# Altium PCB PIPOCPUD_2006.PCBDOC (part 4 of 10)
Units mm, origin at the board's own origin, x right, y up, seen from the top; angles counter-clockwise.
Board outline 179.96 x 114.94 mm, 2 copper layers (Top Layer, Top, Bottom Layer, Bottom), stack 1.341 mm thick; 247 components, 222 nets, 910 pads, 491 vias.
Unrouted connection lines stored in the file: 2.
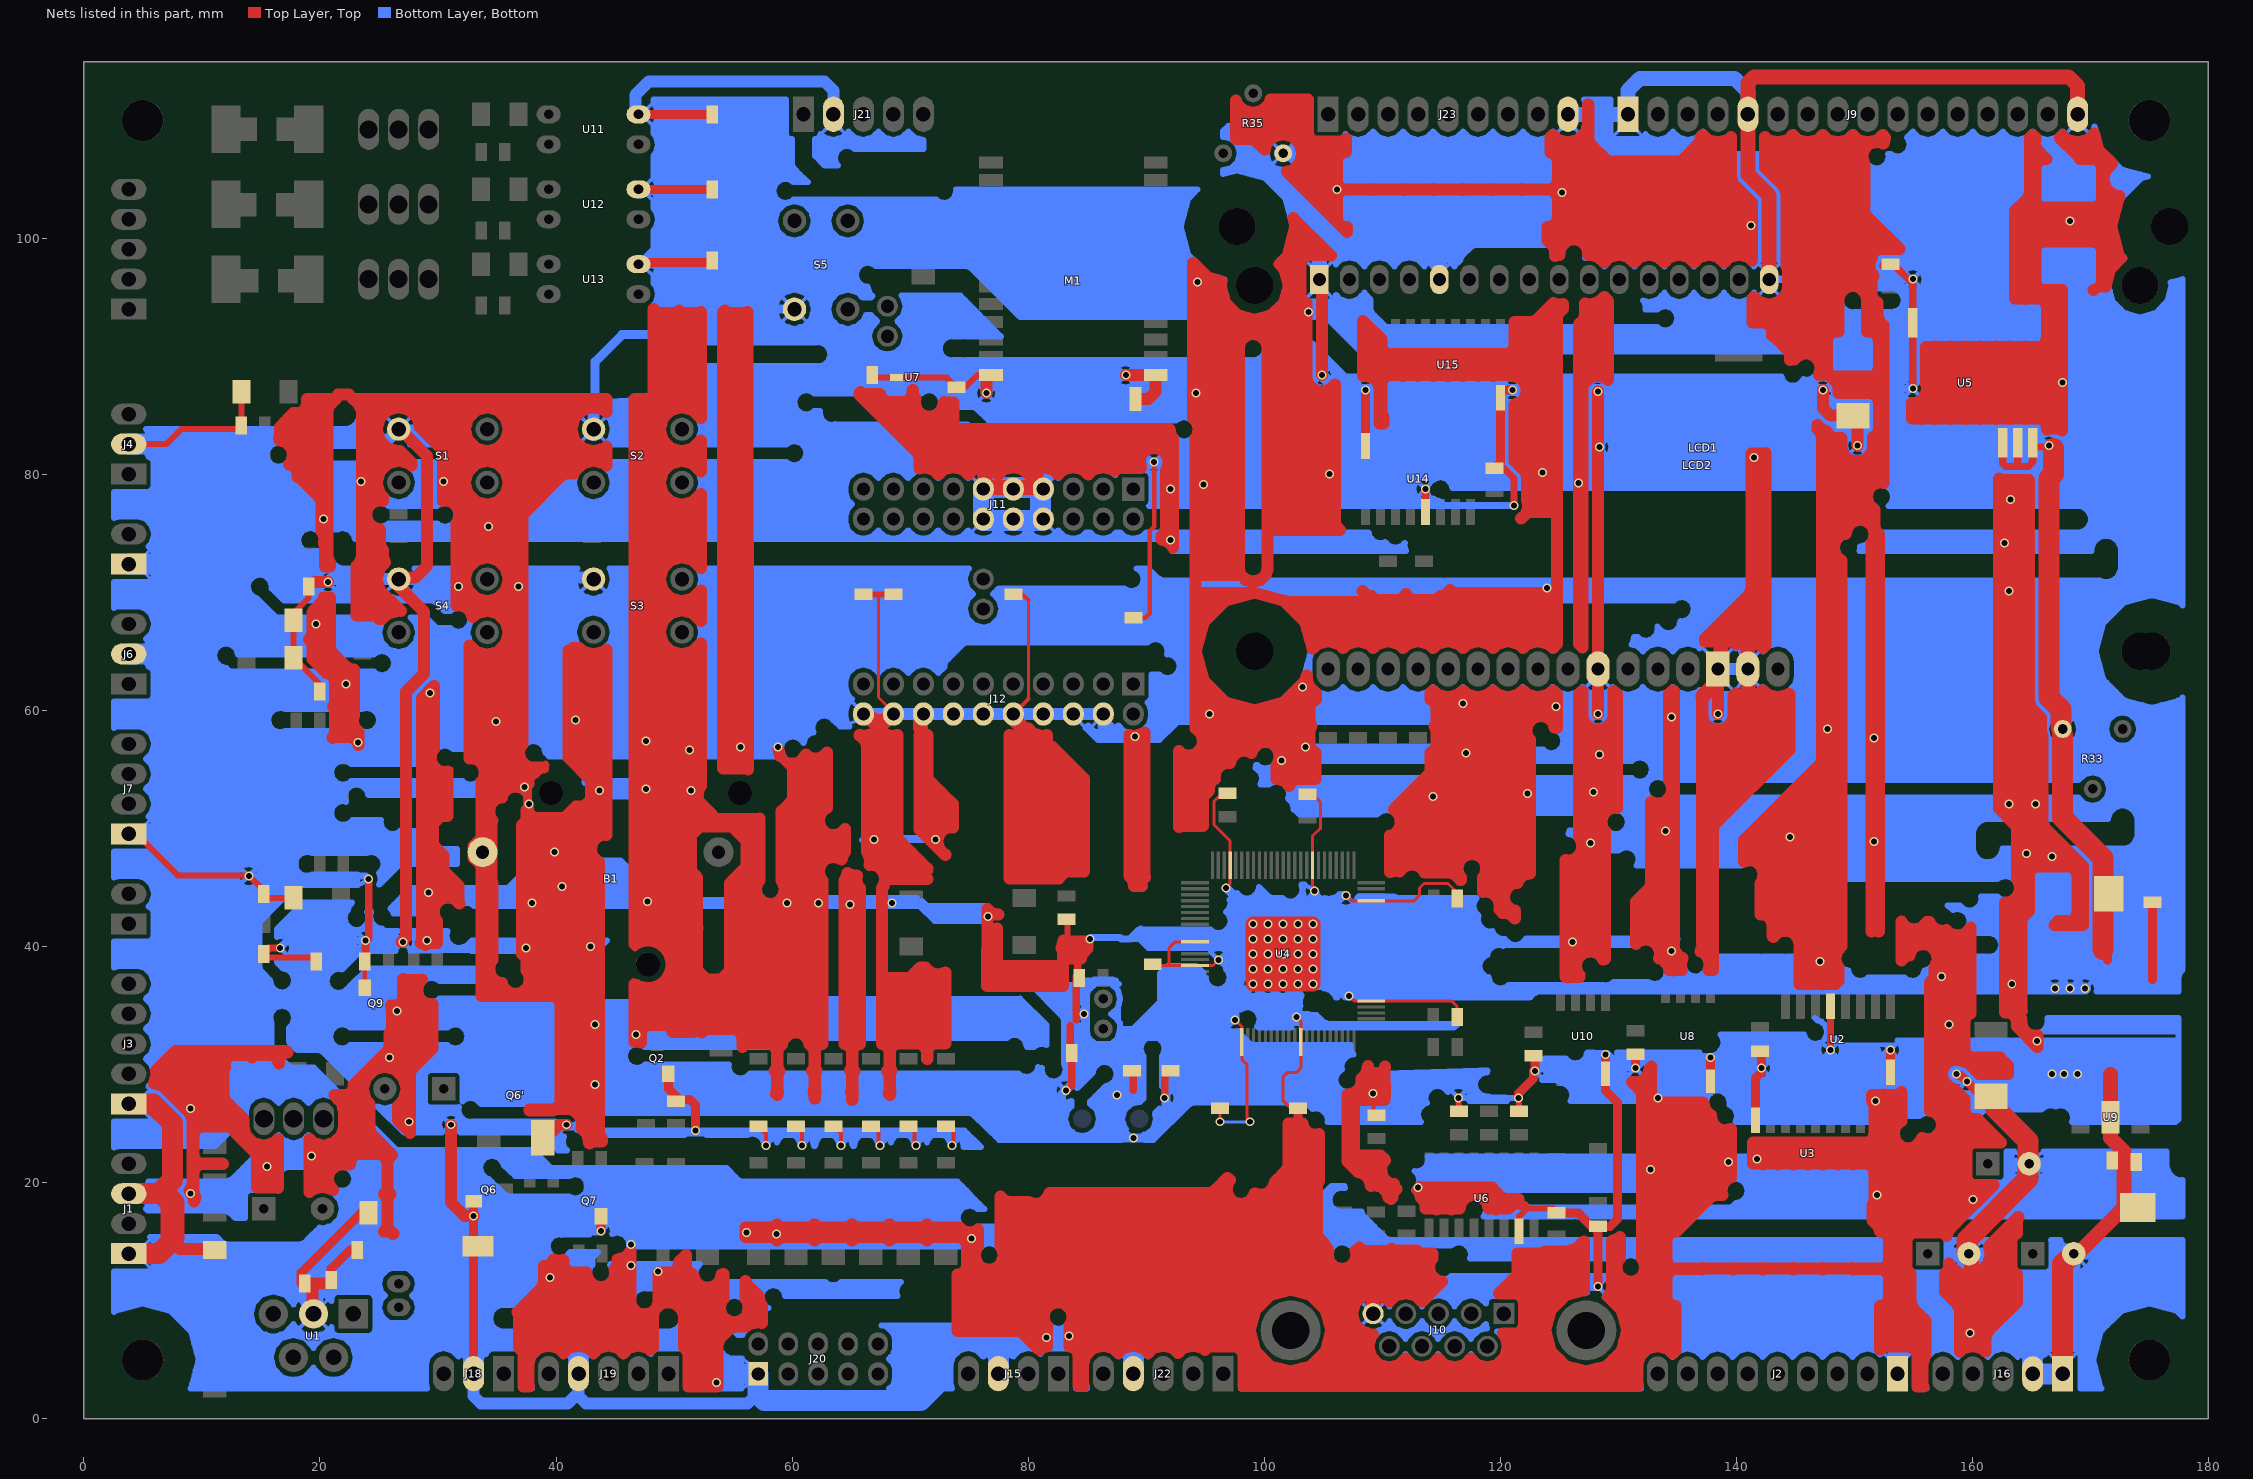
[diagram p4: the nets of this part, all layers, seen from the top]

## Via types
v1: diameter 0.762, hole 0.508, Top Layer, Top to Bottom Layer, Bottom, 489 vias
v2: diameter 0.864, hole 0.813, Top Layer, Top to Bottom Layer, Bottom, 2 vias

## Nets (pads, with @x,y where several pads share a name; then routed paths per layer and width w, separated by ;. In a path a pad name is that pad's centre, name@x,y a point inside that pad or via, vN(x,y) a via of type N, cw(c..) or ccw(c..) an arc to the next point about the centre after c; other vN are vias at no path point) (continued)
GND: (continued)
  Top Layer, Top w1.016: 139.751,60.858 144.475,60.858 ; 140.36,69.088 142.469,69.088 ; 140.64,47.447 148.92,47.447 ; 140.64,48.209 148.92,48.209 ; 140.64,48.971 148.92,48.971 ; 141.072,69.85 142.469,69.85 ; 141.275,70.612 142.469,70.612 ; 141.275,71.374 142.469,71.374 ; 141.275,72.136 142.469,72.136 ; 141.275,72.898 142.469,72.898 ; 141.275,73.66 142.469,73.66 ; 141.275,74.422 142.469,74.422 ; 141.275,75.184 142.469,75.184 ; 141.275,75.946 142.469,75.946 ; 141.275,76.708 142.469,76.708 ; 141.275,77.47 142.469,77.47 ; 141.275,78.232 142.469,78.232 ; 141.275,78.994 142.469,78.994 ; 141.275,79.756 142.469,79.756 ; 141.275,80.518 142.469,80.518 ; v1@141.275,81.28 142.469,81.28 ; 141.351,49.733 148.92,49.733 ; 141.376,93.167 148.666,93.167 ; 141.376,93.929 148.666,93.929 ; 141.376,94.691 141.834,94.691 ; 141.402,21.768 159.487,21.768 ; 141.402,22.53 159.487,22.53 ; 141.402,23.292 153.695,23.292 ; 142.037,42.875 148.92,42.875 ; 142.037,43.637 148.92,43.637 ; 142.037,44.399 148.92,44.399 ; 142.037,45.161 148.92,45.161 ; 142.113,50.495 148.92,50.495 ; 142.138,61.62 142.316,61.62 ; 142.164,46.685 148.92,46.685 ; 142.265,45.923 148.92,45.923 ; 142.418,106.121 150.851,106.121 ; 142.418,106.883 150.647,106.883 ; 142.418,107.645 150.901,107.645 ; 142.418,108.407 142.545,108.407 ; 142.875,51.257 148.92,51.257 ; 142.951,92.405 148.666,92.405 ; 142.977,42.113 148.92,42.113 ; 143.053,41.351 144.12,41.351 ; 143.053,105.359 150.851,105.359 ; 143.231,91.643 147.726,91.643 ; 143.637,52.019 148.92,52.019 ; 143.688,94.691 148.615,94.691 ; 143.815,104.597 150.851,104.597 ; 143.993,90.881 147.65,90.881 ; 144.221,97.739 151.282,97.739 ; 144.221,98.501 151.486,98.501 ; 144.221,99.263 153.619,99.263 ; 144.221,100.025 152.857,100.025 ; 144.221,100.787 152.095,100.787 ; 144.221,101.549 151.333,101.549 ; 144.221,102.311 150.825,102.311 ; 144.221,103.073 150.851,103.073 ; 144.221,103.835 150.851,103.835 ; 144.272,95.453 148.869,95.453 ; 144.374,96.215 151.46,96.215 ; 144.374,96.977 151.486,96.977 ; 144.399,52.781 148.92,52.781 ; 144.45,108.407 145.085,108.407 ; 144.526,90.119 145.415,90.119 ; 145.161,53.543 148.92,53.543 ; 145.237,40.589 148.92,40.589 ; 145.339,37.541 148.666,37.541 ; 145.339,38.303 148.59,38.303 ; 145.339,39.065 148.387,39.065 ; 145.339,39.827 148.742,39.827 ; 145.923,54.305 148.92,54.305 ; 146.406,90.119 147.65,90.119 ; 146.685,55.067 148.92,55.067 ; 146.863,84.023 147.015,84.023 ; 146.99,108.407 147.625,108.407 ; 147.041,88.595 147.777,88.595 ; 147.066,89.357 147.65,89.357 ; 147.218,83.261 147.904,83.261 ; 147.244,55.829 148.92,55.829 ; 147.244,56.591 148.92,56.591 ; 147.244,57.353 148.92,57.353 ; 147.244,58.115 148.92,58.115 ; 147.244,58.877 148.92,58.877 ; 147.244,59.639 148.92,59.639 ; 147.244,60.401 148.92,60.401 ; 147.244,61.163 148.92,61.163 ; 147.244,61.925 148.92,61.925 ; 147.244,62.687 148.92,62.687 ; 147.244,63.449 148.92,63.449 ; 147.244,64.211 148.92,64.211 ; 147.244,64.973 148.92,64.973 ; 147.244,65.735 148.92,65.735 ; 147.244,66.497 148.92,66.497 ; 147.244,67.259 148.92,67.259 ; 147.244,68.021 148.92,68.021 ; 147.244,68.783 148.92,68.783 ; 147.244,69.545 148.92,69.545 ; 147.244,70.307 148.92,70.307 ; 147.244,71.069 148.92,71.069 ; 147.244,71.831 148.92,71.831 ; 147.244,72.593 148.92,72.593 ; 147.244,73.355 148.336,73.355 ; 147.244,74.117 148.311,74.117 ; 147.244,74.879 148.971,74.879 ; 147.244,75.641 149.504,75.641 ; 147.244,76.403 151.714,76.403 ; 147.244,77.165 151.511,77.165 ; 147.244,77.927 151.079,77.927 ; 147.244,78.689 151.181,78.689 ; 147.244,79.451 152.476,79.451 ; 147.244,80.213 152.476,80.213 ; 147.244,80.975 152.476,80.975 ; 147.244,81.737 149.073,81.737 ; 147.244,82.499 148.92,82.499 ; v1(147.32,87.122) 147.32,85.598 147.955,84.963 C24.2@149.86,84.963 150.241,84.963 v1(150.241,82.423) ; 148.438,87.833 152.476,87.833 ; 148.641,87.071 152.476,87.071 ; 148.92,41.351 144.145,41.351 ; 149.53,108.407 150.165,108.407 ; 150.825,95.453 151.46,95.453 ; 151.054,92.405 152.451,92.405 ; 151.054,93.167 152.019,93.167 ; 151.054,93.929 151.968,93.929 ; 151.079,94.691 151.74,94.691 ; 151.384,81.737 152.451,81.737 ; 151.435,41.351 151.74,41.351 ; 151.435,42.113 152.095,42.113 ; 151.435,42.875 152.095,42.875 ; 151.435,43.637 152.095,43.637 ; 151.435,44.399 152.095,44.399 ; 151.435,45.161 152.095,45.161 ; 151.435,45.923 152.095,45.923 ; 151.435,46.685 152.095,46.685 ; 151.435,47.447 152.095,47.447 ; 151.435,48.209 152.095,48.209 ; v1@151.435,48.971 152.095,48.971 ; 151.435,49.733 152.095,49.733 ; 151.435,50.495 152.095,50.495 ; 151.435,51.257 152.095,51.257 ; 151.435,52.019 152.095,52.019 ; 151.435,52.781 152.095,52.781 ; 151.435,53.543 152.095,53.543 ; 151.435,54.305 152.095,54.305 ; 151.435,55.067 152.095,55.067 ; 151.435,55.829 152.095,55.829 ; 151.435,56.591 152.095,56.591 ; v1@151.435,57.353 152.095,57.353 ; 151.435,58.115 152.095,58.115 ; 151.435,58.877 152.095,58.877 ; 151.435,59.639 152.095,59.639 ; 151.435,60.401 152.095,60.401 ; 151.435,61.163 152.095,61.163 ; 151.435,61.925 152.095,61.925 ; 151.435,62.687 152.095,62.687 ; 151.435,63.449 152.095,63.449 ; 151.435,64.211 152.095,64.211 ; 151.435,64.973 152.095,64.973 ; 151.435,65.735 152.095,65.735 ; 151.435,66.497 152.095,66.497 ; 151.435,67.259 152.095,67.259 ; 151.435,68.021 152.095,68.021 ; 151.435,68.783 152.095,68.783 ; 151.435,69.545 152.095,69.545 ; 151.435,70.307 152.095,70.307 ; 151.435,71.069 152.095,71.069 ; 151.435,71.831 152.095,71.831 ; 151.435,72.593 152.095,72.593 ; 151.435,73.355 152.095,73.355 ; 151.435,74.117 152.095,74.117 ; 151.46,75.641 151.714,75.641 ; v1@151.486,27.102 154,27.102 ; 151.536,17.196 159.182,17.196 ; 151.536,17.958 159.944,17.958 ; 151.562,82.499 152.451,82.499 ; 151.638,21.006 159.487,21.006 ; 151.663,24.054 153.34,24.054 ; v1@151.689,18.72 160.706,18.72 ; 151.689,19.482 161.468,19.482 ; 151.689,20.244 159.537,20.244 ; 151.689,24.816 153.543,24.816 ; 151.689,25.578 154,25.578 ; 151.689,26.34 154,26.34 ; 151.714,74.879 152.095,74.879 ; 151.79,83.261 152.451,83.261 ; 151.892,16.434 158.42,16.434 ; 151.917,88.595 152.476,88.595 ; 151.968,91.643 152.451,91.643 ; 152.019,86.309 152.476,86.309 ; 152.07,84.023 152.451,84.023 ; 152.07,84.785 152.476,84.785 ; 152.07,85.547 152.476,85.547 ; 152.07,89.357 152.476,89.357 ; 152.07,90.119 152.476,90.119 ; 152.07,90.881 152.476,90.881 ; 152.07,108.407 152.552,108.407 ; 152.095,41.351 151.765,41.351 ; 152.171,6.528 156.032,6.528 ; 152.171,7.29 156.032,7.29 ; 152.171,8.052 156.032,8.052 ; 152.171,8.814 155.499,8.814 ; 152.4,9.576 154.864,9.576 ; 152.4,12.624 154.457,12.624 ; 152.629,15.672 154.762,15.672 ; 152.908,13.386 154.407,13.386 ; 152.933,10.338 154.762,10.338 ; 152.933,11.1 154.762,11.1 ; 152.933,11.862 154.762,11.862 ; 152.933,14.148 154.407,14.148 ; 152.933,14.91 154.407,14.91 ; 153.975,39.294 154.661,39.294 ; 153.975,40.056 155.194,40.056 ; 153.975,40.818 159.842,40.818 ; 153.975,41.58 154.508,41.58 ; 154.864,85.217 167.589,85.217 ; 154.864,85.979 167.589,85.979 ; 155.194,5.766 156.032,5.766 ; 155.346,3.48 155.778,3.48 ; 155.346,4.242 155.778,4.242 ; 155.346,5.004 155.88,5.004 ; 155.397,23.292 159.842,23.292 ; 155.6,41.58 156.743,41.58 ; 156.032,86.741 167.589,86.741 ; 156.058,88.265 167.589,88.265 ; 156.058,89.027 167.589,89.027 ; 156.058,89.789 167.589,89.789 ; 156.058,90.551 167.589,90.551 ; 156.083,87.503 v1@167.589,87.503 ; 156.388,26.34 159.334,26.34 ; 156.388,27.102 159.283,27.102 ; 156.388,27.864 158.521,27.864 ; 156.388,28.626 157.531,28.626 ; 156.388,29.388 157.429,29.388 ; 156.388,30.15 157.861,30.15 ; 156.388,30.912 159.461,30.912 ; 156.388,31.674 159.334,31.674 ; 156.388,32.436 159.334,32.436 ; 156.388,33.198 159.334,33.198 ; 156.388,33.96 159.385,33.96 ; 156.388,34.722 159.842,34.722 ; 156.388,35.484 159.842,35.484 ; 156.388,36.246 159.842,36.246 ; 156.439,37.008 159.842,37.008 ; 156.769,37.77 159.842,37.77 ; 156.921,38.532 159.842,38.532 ; 156.972,39.294 159.842,39.294 ; 157.048,24.054 161.747,24.054 ; 157.201,25.578 159.614,25.578 ; 157.404,24.816 160.985,24.816 ; 157.632,15.672 157.886,15.672 ; 157.658,11.024 163.779,11.024 ; 157.658,11.786 163.779,11.786 ; 158.115,10.262 163.779,10.262 ; 158.496,12.548 157.912,12.548 ; 158.775,9.5 163.424,9.5 ; 158.928,6.452 161.112,6.452 ; 158.928,7.214 161.239,7.214 ; 158.928,7.976 161.9,7.976 ; 158.928,8.738 162.662,8.738 ; 159.537,30.15 162.738,30.15 ; 159.817,41.58 159.842,41.58 ; 159.842,40.056 156.439,40.056 ; 160.376,29.388 163.017,29.388 ; 160.833,12.548 163.373,12.548 ; 161.366,13.31 163.297,13.31 ; 161.519,14.072 163.297,14.072 ; 161.646,14.834 163.297,14.834 ; 162.23,52.045 165.938,52.045 ; 162.23,52.807 165.938,52.807 ; 162.23,53.569 165.938,53.569 ; 162.23,54.331 165.938,54.331 ; 162.23,55.093 165.938,55.093 ; 162.23,55.855 165.938,55.855 ; 162.23,56.617 165.938,56.617 ; 162.23,57.379 165.938,57.379 ; 162.23,58.141 165.811,58.141 ; 162.23,58.903 165.811,58.903 ; 162.23,59.665 165.481,59.665 ; 162.23,60.427 164.897,60.427 ; 162.23,61.189 164.795,61.189 ; 162.23,61.951 164.795,61.951 ; 162.23,62.713 164.795,62.713 ; 162.23,63.475 164.795,63.475 ; 162.23,64.237 164.795,64.237 ; 162.23,64.999 164.795,64.999 ; 162.23,65.761 164.795,65.761 ; 162.23,66.523 164.795,66.523 ; 162.23,67.285 164.795,67.285 ; 162.23,68.047 164.795,68.047 ; 162.23,68.809 164.795,68.809 ; 162.23,69.571 164.795,69.571 ; 162.23,70.333 164.795,70.333 ; 162.23,71.095 164.795,71.095 ; 162.23,71.857 164.795,71.857 ; 162.23,72.619 164.795,72.619 ; 162.23,73.381 164.795,73.381 ; 162.23,74.143 164.795,74.143 ; 162.23,74.905 164.795,74.905 ; 162.23,75.667 164.795,75.667 ; 162.23,76.429 164.795,76.429 ; 162.23,77.191 164.795,77.191 ; 162.23,77.953 164.795,77.953 ; 162.23,78.715 164.795,78.715 ; 162.23,79.477 164.795,79.477 ; 162.408,15.596 163.601,15.596 ; 162.611,51.283 165.938,51.283 ; 162.738,34.519 164.211,34.519 ; 162.738,35.281 164.16,35.281 ; 162.738,36.043 164.16,36.043 ; 162.738,36.805 164.16,36.805 ; 162.738,37.567 164.16,37.567 ; 162.738,38.329 164.16,38.329 ; 162.738,39.091 164.16,39.091 ; 162.738,39.853 164.16,39.853 ; 162.738,40.615 164.16,40.615 ; 162.738,41.377 164.16,41.377 ; 162.738,42.139 164.16,42.139 ; 162.738,42.901 164.668,42.901 ; 162.738,43.663 164.77,43.663 ; 163.17,16.358 163.779,16.358 ; 163.373,50.521 165.938,50.521 ; 163.601,95.123 167.589,95.123 ; 163.601,95.885 165.506,95.885 ; 163.601,96.647 165.329,96.647 ; 163.601,97.409 165.329,97.409 ; 163.601,98.171 165.329,98.171 ; 163.601,98.933 165.329,98.933 ; 163.601,99.695 165.964,99.695 ; 163.601,100.457 171.856,100.457 ; 163.601,101.219 171.78,101.219 ; 163.601,101.981 171.983,101.981 ; 163.728,33.757 164.135,33.757 ; 163.754,45.949 164.77,45.949 ; 163.754,46.711 165.329,46.711 ; 163.754,47.473 168.656,47.473 ; 163.754,48.235 167.894,48.235 ; 163.754,48.997 167.132,48.997 ; 163.754,49.759 166.37,49.759 ; 163.906,44.425 164.77,44.425 ; 163.982,32.995 164.287,32.995 ; 163.982,45.187 164.77,45.187 ; 164.033,102.743 165.633,102.743 ; 164.109,33.655 164.262,33.02 164.719,32.563 165.354,32.41 165.506,32.436 165.506,31.471 163.754,33.223 163.754,33.68 163.652,33.985 163.347,34.29 163.043,34.392 162.738,34.392 162.738,40.411 162.738,43.739 162.814,43.713 163.424,43.866 163.881,44.323 164.033,44.958 163.881,45.568 163.754,45.695 163.754,49.962 163.678,50.14 163.601,50.292 162.23,51.689 162.23,79.654 162.458,79.553 162.585,79.527 164.795,79.527 164.795,79.273 164.795,61.417 164.795,60.731 165.049,60.122 165.532,59.639 165.811,59.36 165.811,58.191 165.938,57.887 165.938,51.257 165.938,50.571 166.192,49.962 166.675,49.479 169.367,46.787 169.367,41.834 166.954,41.834 167.259,42.139 168.173,42.139 168.478,42.215 168.783,42.52 168.885,42.824 168.885,46.05 168.783,46.355 168.478,46.66 168.173,46.761 165.456,46.761 165.151,46.66 164.846,46.355 164.77,46.05 164.77,43.002 164.668,42.901 ; 164.16,34.671 164.16,34.874 164.109,35.052 164.16,35.204 164.16,42.139 ; 164.744,32.233 v1@165.506,32.233 ; 164.744,103.505 165.329,103.505 ; 164.871,104.267 165.329,104.267 ; 164.871,105.029 165.329,105.029 ; 164.871,105.791 165.329,105.791 ; 164.871,106.553 165.659,106.553 ; 164.871,107.315 165.633,107.315 ; 164.871,108.077 165.303,108.077 ; 166.091,84.455 167.589,84.455 ; 166.243,91.313 167.589,91.313 ; 166.243,94.361 167.589,94.361 ; 166.294,92.075 167.589,92.075 ; 166.294,92.837 167.589,92.837 ; 166.294,93.599 167.589,93.599 ; 167.818,108.077 170.51,108.077 ; 168.224,42.139 169.367,42.139 ; 168.3,46.711 169.367,46.711 ; 168.58,107.315 170.84,107.315 ; 168.885,42.901 169.367,42.901 ; 168.885,43.663 169.367,43.663 ; 168.885,44.425 169.367,44.425 ; 168.885,45.187 169.367,45.187 ; 168.885,45.949 169.367,45.949 ; 170.231,95.606 170.256,95.606 ; 170.282,108.839 170.307,108.839 ; 170.307,99.695 172.06,99.695 ; 170.612,106.553 171.602,106.553 ; 170.637,102.743 172.187,102.743 ; 170.764,95.885 171.323,95.885 ; 170.866,95.987 170.967,96.291 170.967,99.009 170.866,99.314 170.561,99.619 170.256,99.72 166.014,99.72 165.71,99.619 165.405,99.314 165.329,99.009 165.329,96.291 165.405,95.987 165.71,95.682 166.014,95.606 167.589,95.606 167.589,83.693 167.208,83.871 166.522,83.871 166.294,83.769 166.294,84.023 166.218,84.328 165.913,84.633 165.583,84.734 164.592,84.734 164.465,84.684 164.313,84.734 163.322,84.734 163.195,84.684 163.043,84.734 162.052,84.734 161.925,84.684 161.773,84.734 160.782,84.734 160.655,84.684 160.503,84.734 159.512,84.734 159.385,84.684 159.233,84.734 158.242,84.734 158.115,84.684 157.963,84.734 156.972,84.734 156.845,84.684 156.693,84.734 155.702,84.734 155.575,84.684 155.423,84.734 154.864,84.734 154.864,86.03 154.94,86.004 155.55,86.157 156.007,86.614 156.159,87.249 156.058,87.681 156.058,90.78 156.693,90.78 156.845,90.805 156.972,90.78 157.963,90.78 158.115,90.805 158.242,90.78 159.233,90.78 159.385,90.805 159.512,90.78 160.503,90.78 160.655,90.805 160.782,90.78 161.773,90.78 161.925,90.805 162.052,90.78 163.043,90.78 163.195,90.805 163.322,90.78 164.313,90.78 164.465,90.805 164.592,90.78 165.583,90.78 165.913,90.856 166.218,91.161 166.294,91.465 166.294,94.183 166.218,94.488 165.913,94.793 165.583,94.894 164.592,94.894 164.465,94.844 164.313,94.894 163.601,94.894 163.601,102.311 164.414,103.124 164.694,103.403 164.744,103.53 164.871,103.784 164.871,104.216 164.871,108.509 165.1,108.737 165.329,108.509 165.329,108.28 165.303,108.28 165.303,107.848 165.43,107.594 165.481,107.467 165.76,107.188 166.268,106.705 166.014,106.705 165.71,106.604 165.405,106.299 165.329,105.994 165.329,103.276 165.405,102.972 165.71,102.667 166.014,102.591 170.256,102.591 170.561,102.667 170.866,102.972 170.967,103.276 170.967,105.994 170.866,106.299 170.561,106.604 170.256,106.705 169.088,106.705 169.062,106.756 169.012,106.883 168.732,107.163 167.411,108.483 167.411,108.509 167.64,108.737 168.021,108.331 168.91,108.102 169.774,108.331 170.307,108.864 170.663,107.493 171.831,106.324 171.272,105.766 171.069,105.029 171.272,104.267 171.831,103.708 172.466,103.556 172.39,103.454 171.729,100.99 172.39,98.501 172.568,98.323 171.679,97.409 ; 170.967,96.647 171.475,96.647 ; 170.967,97.409 171.679,97.409 ; 170.967,98.171 172.415,98.171 ; 170.967,98.933 172.263,98.933 ; 170.967,103.505 172.441,103.505 ; 170.967,104.267 171.298,104.267 ; 170.967,105.029 171.094,105.029 ; 170.967,105.791 171.298,105.791 ; 171.298,95.987 171.679,97.409 ; 19.253,66.192 19.355,66.497 19.355,68.301 19.939,68.91 19.99,69.037 20.244,69.291 20.32,69.545 20.853,69.545 20.853,65.735 20.853,65.303 20.879,65.176 21.006,64.897 21.336,64.567 21.895,64.008 22.225,63.678 22.352,63.627 22.428,63.551 22.733,63.475 22.885,63.475 22.885,59.614 22.758,59.182 22.911,58.547 23.266,58.217 23.266,57.048 23.165,57.353 22.86,57.658 22.555,57.76 21.361,57.76 21.057,57.658 21.057,57.709 21.184,57.861 21.285,58.166 21.285,59.919 21.184,60.223 21.107,60.325 21.184,60.401 21.285,60.706 21.285,62.459 21.184,62.763 20.879,63.068 20.574,63.17 20.549,63.17 19.355,64.364 19.355,65.532 19.253,65.837 19.075,66.015 19.253,66.192 ; 20.422,72.187 20.422,73.889 20.345,74.168 20.396,74.422 20.244,75.032 20.117,75.159 20.117,77.673 19.939,78.054 19.634,78.359 18.364,79.629 18.085,79.756 18.085,80.137 17.983,80.442 17.678,80.747 17.374,80.823 17.577,81.026 17.729,81.661 17.577,82.271 17.12,82.728 16.586,82.855 16.535,83.007 16.612,83.236 16.612,83.998 17.78,85.192 18.186,85.192 18.491,85.268 18.796,85.573 18.898,85.877 18.898,86.36 21.361,86.36 21.26,86.309 20.853,85.903 ; 20.422,72.187 20.853,72.187 ; 20.422,72.187 20.853,72.187 ; 20.853,72.187 20.853,72.492 20.65,72.974 20.65,73.99 20.65,74.574 20.65,85.369 20.853,85.903 ; 21.844,24.003 22.022,24.663 22.022,26.111 21.844,26.772 21.336,27.28 21.311,27.305 21.234,27.407 22.149,27.407 22.454,27.483 22.758,27.788 22.86,28.092 22.86,28.245 23.165,28.575 ; 21.844,24.003 21.184,23.343 20.32,23.114 19.431,23.343 19.101,23.698 19.101,19.202 19.279,19.38 20.218,19.634 21.107,19.38 20.879,19.634 20.803,19.685 20.752,19.914 20.701,20.066 20.701,20.142 20.65,20.32 20.701,20.472 20.701,20.549 20.752,20.701 20.803,20.93 20.879,20.98 21.209,21.311 21.26,21.387 21.488,21.438 21.641,21.514 21.717,21.514 21.895,21.539 22.047,21.514 22.555,21.514 22.555,21.717 ; 23.165,28.575 25.375,30.785 25.705,31.115 25.832,31.394 25.883,31.521 25.883,31.953 25.883,32.639 26.01,32.766 26.086,33.096 26.086,34.696 26.01,34.976 26.34,34.976 26.67,35.052 26.975,35.357 27.051,35.687 27.051,37.236 27.33,37.16 28.524,37.16 28.626,37.186 28.372,36.932 28.219,36.322 28.372,35.687 28.829,35.23 29.464,35.077 29.54,35.103 29.54,31.369 27.762,29.591 27.686,29.439 27.635,29.261 27.635,24.206 26.594,25.248 26.594,26.467 27.102,27 27.356,27.94 27.102,28.854 26.416,29.54 25.502,29.794 24.562,29.54 23.876,28.854 23.622,27.94 23.876,27 24.206,26.67 24.206,24.511 24.384,24.079 24.714,23.749 26.111,22.327 25.806,22.022 25.73,21.717 ; 37.262,2.718 37.262,5.41 37.16,5.715 36.855,6.02 36.881,8.763 36.754,9.042 38.76,11.049 38.964,11.481 38.964,12.929 39.116,12.929 39.421,13.005 39.726,13.31 39.776,13.487 40.31,13.36 40.615,13.437 40.615,13.081 40.691,12.776 40.996,12.471 41.3,12.395 42.494,12.395 42.57,12.395 42.57,12.37 42.723,11.735 43.18,11.278 43.815,11.125 44.425,11.278 44.882,11.735 45.034,12.37 44.958,12.649 45.085,12.776 45.187,13.081 45.187,13.487 45.212,13.487 45.822,13.64 46.279,14.097 46.304,14.173 46.304,10.185 46.253,10.033 46.304,9.855 46.304,9.779 46.355,9.627 46.406,9.398 46.482,9.347 46.812,9.017 46.863,8.941 47.092,8.89 47.244,8.839 47.32,8.839 47.498,8.788 47.65,8.839 47.727,8.839 47.879,8.89 48.108,8.941 48.387,9.246 48.209,8.763 48.209,6.02 47.981,5.817 47.854,5.944 46.99,6.172 46.101,5.944 45.72,5.537 45.314,5.944 44.45,6.172 43.561,5.944 43.18,5.537 42.774,5.944 41.91,6.172 41.021,5.944 40.64,5.537 40.234,5.944 39.37,6.172 38.481,5.944 37.821,5.283 37.668,4.623 37.668,2.972 37.719,2.718 ; 37.262,2.718 37.719,2.718 ; 37.262,2.718 37.719,2.718 ; 51.232,2.718 51.232,5.41 51.13,5.715 50.851,6.02 50.851,8.763 50.648,9.246 50.267,9.627 49.784,9.83 49.251,9.83 48.768,9.627 48.565,9.398 48.616,9.627 48.692,9.779 48.692,9.855 48.717,10.033 48.692,10.185 48.692,12.395 49.708,12.395 50.038,12.471 50.343,12.776 50.419,13.106 50.419,13.284 51.029,13.868 51.029,12.878 51.105,12.573 51.41,12.268 51.613,12.217 51.74,11.684 52.197,11.227 52.832,11.074 53.442,11.227 53.899,11.684 54.026,12.217 54.178,12.243 54.178,10.135 54.026,10.008 53.873,9.398 54.026,8.763 54.483,8.306 55.118,8.153 55.728,8.306 56.185,8.763 56.337,9.398 56.185,10.008 56.058,10.135 56.058,11.659 56.159,11.354 57.201,10.338 57.175,10.287 57.328,9.652 57.429,9.576 ; 51.232,2.718 v1@53.67,2.718 ; 51.232,2.718 v1@53.67,2.718 ; v1@53.67,2.718 53.67,5.664 53.67,6.248 53.873,6.782 54.254,7.163 54.28,7.188 54.661,7.569 55.194,7.798 56.109,7.798 56.261,7.95 57.125,8.179 57.429,8.103 57.429,9.576 ; 58.75,27.864 58.75,29.058 58.826,29.362 58.928,29.464 58.826,29.566 58.75,29.87 58.75,31.064 58.826,31.369 59.131,31.674 59.233,32.106 59.69,32.563 60.325,32.715 60.935,32.563 61.392,32.106 61.493,31.674 61.798,31.369 61.9,31.064 61.9,29.87 61.798,29.566 61.697,29.464 61.798,29.362 61.9,29.058 61.9,27.864 61.824,27.584 61.9,27.33 61.9,27.127 61.925,27.102 61.925,27.356 61.976,27.635 61.925,27.889 61.925,29.083 62.001,29.388 ; 65.507,46.025 65.43,45.72 65.583,45.085 65.735,44.958 65.735,31.75 65.481,31.674 65.176,31.369 65.1,31.064 65.1,29.87 65.176,29.566 65.278,29.464 65.176,29.362 65.1,29.058 65.1,27.864 65.151,27.584 65.1,27.33 65.1,26.975 65.075,27 65.075,27.356 64.999,27.635 65.075,27.889 65.075,29.083 64.973,29.388 64.897,29.489 64.973,29.566 65.075,29.87 65.075,31.064 64.973,31.369 64.668,31.674 64.44,31.75 64.44,45.593 64.567,45.72 64.694,46.228 64.77,46.152 65.405,45.999 65.507,46.025 ; 66.345,47.981 66.472,47.854 66.624,47.244 66.548,46.914 66.675,46.939 67.285,46.787 67.742,46.33 67.894,45.72 67.742,45.085 67.615,44.958 67.615,31.75 67.843,31.674 68.148,31.369 68.25,31.064 68.25,29.87 68.148,29.566 68.047,29.464 68.148,29.362 68.25,29.058 68.25,27.864 68.174,27.584 68.199,27.483 68.275,27.407 68.351,27.61 68.275,27.889 68.275,29.083 68.351,29.388 68.428,29.489 68.351,29.566 68.275,29.87 68.275,31.064 68.351,31.369 68.656,31.674 68.961,31.775 70.714,31.775 71.018,31.674 71.323,31.369 71.425,31.064 71.425,30.48 71.45,30.455 ; 76.505,36.627 82.956,36.627 ; 76.505,36.627 82.956,36.627 ; 88.976,45.136 89.637,45.136 88.976,45.136 ; 100.254,90.5 100.279,90.678 100.254,90.83 100.254,90.907 100.178,91.059 100.127,91.288 99.67,91.745 99.441,91.796 99.289,91.872 99.212,91.872 99.06,91.897 98.882,91.872 98.806,91.872 98.654,91.796 98.425,91.745 98.374,91.669 98.044,91.338 97.968,91.288 97.917,91.059 97.866,90.907 97.866,90.83 97.815,90.678 97.866,90.5 97.866,72.288 97.815,72.136 97.866,71.958 97.866,71.882 97.917,71.73 97.968,71.501 98.044,71.45 98.374,71.12 98.425,71.044 98.654,70.993 98.806,70.942 98.882,70.942 99.06,70.891 99.212,70.942 99.289,70.942 99.441,70.993 99.67,71.044 100.127,71.501 100.178,71.73 100.254,71.882 100.254,71.958 100.279,72.136 100.254,72.288 100.254,90.5 ; 104.47,15.672 104.521,15.494 104.597,15.342 105.105,14.808 105.181,14.58 105.461,14.3 105.359,13.919 105.512,13.284 105.969,12.827 106.604,12.675 107.213,12.827 107.671,13.284 107.823,13.919 107.747,14.249 107.848,14.275 108.077,14.478 108.28,14.275 108.585,14.199 110.338,14.199 110.642,14.275 110.795,14.402 110.871,14.326 111.176,14.249 112.928,14.249 112.954,14.249 113.157,14.046 113.462,13.97 114.249,13.97 114.249,13.564 114.097,13.437 113.944,12.827 114.097,12.192 114.554,11.735 115.037,11.608 114.148,10.719 113.868,10.439 113.843,10.389 113.36,9.906 112.852,10.414 111.989,10.643 111.1,10.414 110.592,9.906 110.084,10.414 109.22,10.643 108.331,10.414 107.671,9.754 107.442,8.89 107.671,8.001 108.331,7.341 109.195,7.112 109.042,6.985 108.814,6.121 109.042,5.232 109.703,4.572 110.592,4.343 111.455,4.572 111.963,5.08 112.471,4.572 113.36,4.343 114.224,4.572 114.732,5.08 115.24,4.572 116.129,4.343 116.992,4.572 117.5,5.08 118.008,4.572 118.897,4.343 119.761,4.572 120.421,5.232 120.65,6.121 120.421,6.985 120.218,7.188 121.285,7.188 121.59,7.264 121.895,7.569 121.996,7.874 121.996,9.881 121.895,10.185 121.59,10.49 121.285,10.592 119.863,10.592 120.98,11.684 121.26,11.963 121.31,12.09 121.437,12.344 121.437,12.776 121.437,13.97 122.072,13.97 122.225,13.995 122.352,13.97 123.342,13.97 123.647,14.046 123.774,14.173 123.876,14.148 ; 104.47,15.672 104.47,19.736 104.521,19.914 104.597,20.066 104.648,20.117 104.648,24.105 104.394,24.028 103.759,24.181 103.302,24.638 103.226,24.994 102.032,24.994 102.032,21.387 101.956,21.209 101.879,21.057 100.889,20.041 100.762,19.558 100.305,19.101 99.695,18.948 99.187,19.075 99.111,18.796 98.654,18.339 98.044,18.186 97.409,18.339 96.952,18.796 96.799,19.431 96.952,20.041 97.104,20.193 96.876,20.396 96.037,19.533 95.91,19.406 95.783,19.279 95.783,19.253 95.758,19.253 95.606,19.177 95.453,19.126 95.428,19.126 95.25,19.126 95.072,19.101 95.072,19.126 81.788,19.126 81.712,18.796 81.255,18.339 80.645,18.186 80.01,18.339 80.01,18.364 78.283,18.364 78.105,18.415 77.953,18.491 77.648,18.796 77.648,14.58 77.775,14.453 77.927,13.843 77.775,13.208 77.318,12.751 76.708,12.598 76.073,12.751 75.616,13.208 75.463,13.843 75.616,14.453 75.768,14.58 75.768,16.027 75.667,15.926 75.057,15.773 74.422,15.926 74.168,16.205 74.117,16.205 71.907,16.205 71.603,16.281 71.425,16.459 71.247,16.281 70.942,16.205 68.732,16.205 68.428,16.281 68.25,16.459 68.072,16.281 67.767,16.205 65.557,16.205 65.253,16.281 65.075,16.459 64.897,16.281 64.592,16.205 62.382,16.205 62.078,16.281 61.9,16.459 61.722,16.281 61.417,16.205 59.207,16.205 58.903,16.281 58.725,16.459 58.547,16.281 58.242,16.205 56.058,16.205 56.058,15.367 58.242,15.367 58.547,15.265 58.725,15.088 58.903,15.265 59.207,15.367 61.417,15.367 61.722,15.265 61.9,15.088 62.078,15.265 62.382,15.367 64.592,15.367 64.897,15.265 65.075,15.088 65.253,15.265 65.557,15.367 67.767,15.367 68.072,15.265 68.25,15.088 68.428,15.265 68.732,15.367 70.942,15.367 71.247,15.265 71.425,15.088 71.603,15.265 71.907,15.367 74.117,15.367 74.422,15.265 74.727,14.961 74.828,14.656 74.828,12.903 74.727,12.598 74.422,12.294 74.117,12.217 74.016,12.217 74.016,7.417 79.172,7.417 79.35,7.341 79.502,7.264 80.797,5.969 80.797,5.944 80.874,5.944 81.001,5.817 81.229,6.02 81.534,6.121 81.61,6.121 81.61,7.874 81.458,8.001 81.305,8.636 81.458,9.246 81.915,9.703 82.55,9.855 83.16,9.703 83.617,9.246 83.769,8.636 83.617,8.001 83.49,7.874 83.49,6.121 83.541,6.121 83.845,6.02 84.15,5.715 84.252,5.41 84.252,2.743 84.709,2.743 84.658,2.972 84.658,4.623 84.811,5.283 85.471,5.944 86.36,6.172 87.224,5.944 87.63,5.537 88.011,5.944 88.9,6.172 89.764,5.944 90.17,5.537 90.551,5.944 91.44,6.172 92.304,5.944 92.71,5.537 93.091,5.944 93.98,6.172 94.844,5.944 94.971,5.817 95.199,6.02 95.504,6.121 97.511,6.121 97.815,6.02 98.12,5.715 98.222,5.41 98.222,2.743 131.674,2.743 131.623,2.946 131.623,4.597 131.775,5.258 132.436,5.918 133.325,6.147 134.188,5.918 134.595,5.512 134.823,5.74 134.823,9.525 134.772,9.525 134.468,9.601 134.163,9.906 134.087,10.211 134.087,11.963 134.163,12.268 134.468,12.573 134.772,12.675 136.982,12.675 137.109,12.624 137.312,12.7 139.522,12.7 139.7,12.649 139.852,12.7 142.062,12.7 142.24,12.649 142.392,12.7 144.602,12.7 144.78,12.649 144.932,12.7 147.142,12.7 147.32,12.649 147.472,12.7 149.682,12.7 149.885,12.624 150.012,12.675 152.222,12.675 152.527,12.573 152.832,12.268 152.933,11.963 152.933,10.211 152.832,9.906 152.527,9.601 152.222,9.525 152.171,9.525 152.171,5.842 152.324,5.994 152.629,6.096 154.635,6.096 154.94,5.994 155.245,5.69 155.346,5.385 155.346,2.718 ; 112.522,46.939 111.887,46.787 111.455,46.355 111.125,46.431 110.668,46.304 110.668,49.378 110.973,49.454 111.43,49.911 111.582,50.546 111.43,51.156 110.973,51.613 113.944,54.585 114.021,54.737 114.097,54.915 114.097,56.439 114.198,56.464 114.503,56.769 114.605,57.074 114.605,58.268 114.503,58.572 114.402,58.674 114.503,58.776 114.605,59.08 114.605,60.274 114.503,60.579 114.198,60.884 114.071,60.935 114.071,61.468 114.3,61.697 114.63,61.366 115.57,61.112 116.484,61.366 116.84,61.697 117.17,61.366 118.11,61.112 119.024,61.366 119.38,61.697 119.71,61.366 120.65,61.112 121.564,61.366 121.92,61.697 122.25,61.366 123.19,61.112 124.104,61.366 124.46,61.697 124.79,61.366 124.79,58.496 124.587,58.547 124.511,58.903 124.054,59.36 123.444,59.512 122.809,59.36 122.352,58.903 122.199,58.293 122.352,57.658 122.504,57.531 122.504,46.177 ; 112.522,46.939 113.132,46.787 113.589,46.33 113.589,46.279 115.748,46.279 115.926,46.203 116.078,46.126 116.586,45.644 116.662,45.644 116.662,45.847 116.51,45.974 116.357,46.609 116.51,47.219 116.967,47.676 117.602,47.828 118.212,47.676 118.669,47.219 118.821,46.609 118.669,45.974 118.542,45.847 118.542,44.602 118.745,44.653 ; 118.745,44.653 119.355,44.501 119.812,44.044 119.964,43.434 119.913,43.18 120.193,42.901 120.193,42.85 120.269,42.875 120.879,42.723 121.234,42.367 121.234,43.028 120.904,43.104 120.447,43.561 120.294,44.196 120.447,44.806 120.904,45.263 121.437,45.39 121.463,45.568 121.92,46.025 122.504,46.177 ; 123.876,14.148 125.628,14.148 ; 125.628,14.148 125.933,14.224 126.009,14.3 126.086,14.3 126.517,14.478 126.848,14.808 127.076,15.011 127.076,11.328 127.025,11.176 127.076,10.998 127.076,10.922 127.076,10.871 125.527,10.465 124.257,9.195 123.8,7.468 124.257,5.715 125.527,4.445 127.279,3.988 129.007,4.445 130.277,5.715 130.734,7.468 130.277,9.195 129.134,10.338 ; 125.73,47.269 126.34,47.422 126.797,47.879 126.949,48.514 126.797,49.124 126.67,49.251 126.67,61.366 126.949,61.646 126.949,59.411 127.127,58.928 127.508,58.547 127.991,58.369 128.524,58.369 129.007,58.547 129.388,58.928 129.591,59.411 129.591,61.646 129.87,61.366 129.87,51.74 129.794,51.765 129.159,51.613 128.702,51.156 128.549,50.546 128.702,49.911 128.854,49.784 128.854,38.938 128.702,38.887 128.702,38.964 128.245,39.421 127.635,39.573 127,39.421 126.543,38.964 126.39,38.354 126.543,37.719 126.695,37.592 126.695,37.414 125.857,37.414 125.73,37.363 125.578,37.414 125.527,37.414 125.527,47.32 125.73,47.269 ; 129.134,10.338 129.261,10.49 129.337,10.541 129.388,10.77 129.464,10.922 129.464,10.998 129.489,11.176 129.464,11.328 129.464,15.062 129.515,15.062 129.946,15.24 130.124,15.392 130.124,13.564 129.972,13.437 129.819,12.827 129.972,12.192 130.429,11.735 131.064,11.582 131.674,11.735 132.131,12.192 132.283,12.827 132.131,13.437 132.004,13.564 132.004,27.483 131.928,27.661 131.851,27.813 131.14,28.524 131.191,28.524 131.267,28.524 131.445,28.473 131.597,28.524 131.674,28.524 131.826,28.575 132.055,28.626 132.512,29.083 132.563,29.312 132.639,29.464 132.639,29.54 132.664,29.693 132.817,29.845 132.766,29.667 132.766,27.457 132.842,27.153 133.147,26.848 133.477,26.772 134.468,26.772 134.62,26.797 134.747,26.772 135.738,26.772 135.89,26.797 136.017,26.772 137.008,26.772 137.16,26.797 137.185,26.797 137.338,26.162 137.795,25.705 137.846,25.705 137.82,25.654 137.973,25.019 138.43,24.562 139.065,24.409 139.522,24.536 139.522,20.422 139.319,20.371 138.862,19.914 138.709,19.304 138.811,18.948 138.633,18.948 138.201,18.948 137.947,18.821 137.82,18.771 137.541,18.491 135.153,16.104 134.899,15.85 134.772,15.85 134.468,15.748 134.163,15.443 134.087,15.138 134.087,13.386 ; 134.087,13.386 134.163,13.081 134.468,12.776 134.772,12.7 136.982,12.7 137.185,12.751 137.312,12.725 139.522,12.725 139.7,12.751 139.852,12.725 142.062,12.725 142.24,12.751 142.392,12.725 144.602,12.725 144.78,12.751 144.932,12.725 147.142,12.725 147.32,12.751 147.472,12.725 149.682,12.725 149.809,12.751 150.012,12.7 152.222,12.7 152.527,12.776 152.832,13.081 152.933,13.386 152.933,15.138 152.832,15.443 152.527,15.748 152.222,15.85 152.171,15.85 152.171,15.951 152.044,16.205 151.994,16.332 151.714,16.612 151.536,16.789 151.536,18.085 151.587,18.161 151.689,18.466 151.689,20.879 151.587,21.184 151.282,21.488 150.978,21.59 149.987,21.59 149.86,21.539 149.708,21.59 148.717,21.59 148.59,21.539 148.438,21.59 147.447,21.59 147.32,21.539 147.168,21.59 146.177,21.59 146.05,21.539 145.898,21.59 144.907,21.59 144.78,21.539 144.628,21.59 143.637,21.59 143.51,21.539 143.358,21.59 142.367,21.59 142.24,21.539 142.088,21.59 141.402,21.59 141.402,23.368 142.088,23.368 142.24,23.393 142.367,23.368 143.358,23.368 143.51,23.393 143.637,23.368 144.628,23.368 144.78,23.393 144.907,23.368 145.898,23.368 146.05,23.393 146.177,23.368 147.168,23.368 147.32,23.393 147.447,23.368 148.438,23.368 148.59,23.393 148.717,23.368 149.708,23.368 149.86,23.393 149.987,23.368 150.978,23.368 151.282,23.444 151.587,23.749 151.689,24.054 151.689,26.467 151.587,26.772 151.486,26.899 151.486,27.432 152.248,27.432 152.4,27.457 152.527,27.432 153.518,27.432 153.822,27.508 154,27.661 154,25.197 153.924,25.197 153.467,24.74 153.314,24.13 153.467,23.495 153.924,23.038 154.559,22.885 155.169,23.038 155.626,23.495 155.702,23.774 156.21,23.647 156.82,23.8 157.277,24.257 157.429,24.892 157.277,25.502 156.82,25.959 156.388,26.06 156.388,36.932 156.616,37.186 156.693,37.338 156.769,37.516 156.769,38.227 156.896,38.354 157.048,38.989 156.896,39.599 156.439,40.056 ; 137.084,40.284 137.109,40.132 137.084,39.954 137.084,39.878 137.008,39.726 136.957,39.573 137.135,39.548 137.592,39.091 137.744,38.481 137.617,37.998 ; 137.084,40.284 137.084,61.239 137.109,61.239 137.109,59.411 137.287,58.928 137.668,58.547 138.151,58.369 138.684,58.369 139.167,58.547 139.548,58.928 139.751,59.411 139.751,61.239 139.827,61.265 139.979,61.417 140.03,61.366 140.97,61.112 141.884,61.366 142.24,61.697 142.57,61.366 143.51,61.112 144.424,61.366 144.475,61.392 144.475,56.642 138.125,50.292 138.049,50.14 137.998,49.962 137.998,37.998 ; 137.617,37.998 137.998,37.998 ; 137.617,37.998 137.998,37.998 ; 144.145,41.351 143.967,41.326 143.891,41.326 143.739,41.25 143.51,41.199 143.459,41.123 143.129,40.792 143.053,40.869 143.053,41.961 142.9,42.291 142.621,42.57 142.291,42.723 142.037,42.723 142.037,45.339 142.164,45.466 142.316,46.101 142.164,46.711 141.707,47.168 141.097,47.32 140.64,47.193 140.64,47.93 140.64,48.997 147.091,55.474 147.168,55.626 147.244,55.804 147.244,83.236 147.168,83.414 147.091,83.566 146.863,83.82 146.863,84.176 147.193,83.82 147.676,83.642 147.726,83.439 148.031,83.134 148.336,83.058 148.92,83.058 148.92,82.144 149.098,81.661 149.479,81.28 149.962,81.102 150.495,81.102 150.978,81.28 151.359,81.661 151.562,82.144 151.562,83.109 151.663,83.134 151.968,83.439 152.07,83.744 152.07,86.157 151.968,86.462 151.663,86.766 151.359,86.868 148.641,86.868 148.641,87.376 148.438,87.859 148.057,88.24 147.574,88.443 147.041,88.443 146.99,88.392 147.142,89.027 146.99,89.637 146.533,90.094 145.923,90.246 145.288,90.094 144.907,89.713 144.78,89.738 144.551,89.687 144.551,90.119 144.424,90.373 144.374,90.5 144.094,90.78 143.485,91.389 143.205,91.669 143.078,91.719 143.027,91.745 143.027,92.151 142.926,92.456 142.621,92.761 142.316,92.862 141.376,92.862 141.376,94.894 141.503,95.021 141.935,94.59 142.773,94.361 143.586,94.59 144.196,95.199 144.374,95.809 144.374,97.155 144.221,97.714 144.221,103.886 143.993,104.419 143.586,104.826 142.418,105.994 142.418,108.56 142.621,108.331 143.51,108.102 144.374,108.331 144.78,108.737 145.161,108.331 146.05,108.102 146.914,108.331 147.32,108.737 147.701,108.331 148.59,108.102 149.454,108.331 149.86,108.737 150.241,108.331 151.13,108.102 151.994,108.331 152.4,108.737 152.578,108.534 152.451,108.001 151.892,108.153 151.257,108.001 150.8,107.544 150.647,106.934 150.8,106.299 150.851,106.274 150.851,102.692 150.825,102.692 150.825,102.26 150.952,102.006 151.003,101.879 151.282,101.6 153.822,99.085 152.146,99.085 151.841,98.984 151.536,98.679 151.46,98.374 151.46,98.298 151.435,98.273 151.308,97.993 151.282,97.866 151.282,97.434 151.308,97.307 151.435,97.028 151.511,96.952 151.536,96.876 151.613,96.799 151.536,96.698 151.46,96.393 151.46,95.199 151.536,94.894 151.841,94.59 151.968,94.564 151.968,94.488 151.968,93.345 152.146,92.913 152.451,92.608 152.451,91.465 152.476,91.415 152.476,84.074 152.451,84.023 ; 144.145,41.351 144.297,41.326 144.374,41.326 144.526,41.25 144.755,41.199 145.212,40.742 145.263,40.513 145.339,40.361 145.339,40.284 145.364,40.132 145.339,39.954 145.339,36.83 145.898,36.83 146.05,36.779 146.177,36.83 147.168,36.83 147.32,36.779 147.447,36.83 148.412,36.83 148.666,37.084 148.666,38.227 148.514,38.354 148.361,38.989 148.514,39.599 148.793,39.853 148.793,39.878 148.92,40.005 148.92,72.695 148.844,72.695 148.387,73.152 148.234,73.787 148.387,74.397 148.844,74.854 149.25,74.955 149.403,75.54 149.86,75.997 150.495,76.149 151.105,75.997 151.562,75.54 151.714,74.93 151.562,74.295 151.435,74.168 151.435,41.275 151.511,41.326 151.587,41.326 151.765,41.351 ; 151.765,41.351 151.917,41.326 151.994,41.326 152.095,41.275 152.095,74.905 151.841,75.159 151.765,75.311 151.714,75.489 151.714,77.013 151.638,77.013 151.181,77.47 151.028,78.105 151.181,78.715 151.638,79.172 152.273,79.324 152.476,79.273 152.476,81.255 152.451,81.305 152.451,84.023 ; 155.194,40.056 154.737,39.599 154.661,39.243 154.305,39.167 153.975,38.811 153.975,42.113 153.975,42.037 154.432,41.58 155.067,41.427 155.677,41.58 156.134,42.037 156.134,42.088 156.21,42.062 156.337,42.088 156.388,41.91 156.845,41.453 157.48,41.3 157.81,41.377 158.115,41.072 158.75,40.919 159.36,41.072 159.817,41.529 159.842,41.605 159.842,40.411 159.842,39.827 159.842,34.315 159.715,34.29 159.41,33.985 159.334,33.68 159.334,31.267 159.41,30.963 159.715,30.658 160.02,30.582 162.306,30.582 163.017,29.87 163.017,29.21 160.553,29.21 160.122,29.642 159.664,30.074 159.233,30.251 159.233,30.277 159.004,30.328 158.852,30.378 158.775,30.378 158.623,30.429 158.445,30.378 158.369,30.378 158.217,30.328 157.988,30.277 157.937,30.201 157.607,29.87 157.531,29.82 157.48,29.591 157.429,29.439 157.429,29.362 157.378,29.21 157.429,29.032 157.429,28.956 157.48,28.804 157.531,28.575 157.607,28.524 157.734,28.397 158.064,28.067 158.496,27.889 158.826,27.559 158.877,27.483 159.334,27.051 159.334,26.086 159.41,25.781 159.715,25.476 160.02,25.4 160.426,25.4 160.477,25.324 160.96,24.841 162.408,23.368 162.382,23.393 160.172,23.393 159.868,23.292 159.563,22.987 159.487,22.682 159.487,20.472 159.563,20.168 159.868,19.863 160.172,19.787 161.773,19.787 158.547,16.535 158.064,16.053 157.81,15.469 157.607,15.672 157.302,15.773 155.092,15.773 154.788,15.672 154.483,15.367 154.407,15.062 154.407,12.852 154.483,12.548 154.762,12.268 154.762,10.439 154.762,9.855 154.965,9.322 155.372,8.915 156.032,8.28 156.032,5.334 155.931,5.258 155.778,4.597 155.778,2.946 155.829,2.718 ; 155.194,40.056 155.829,40.208 156.439,40.056 ; 155.346,2.718 155.829,2.718 ; 155.346,2.718 155.829,2.718 ; 157.912,12.548 158.013,12.852 158.013,13.132 158.064,13.005 158.547,12.522 158.598,12.497 158.75,12.344 159.69,12.09 160.604,12.344 161.29,13.03 161.544,13.97 161.392,14.58 163.881,17.094 163.779,16.789 163.779,16.205 163.779,15.697 163.678,15.672 163.373,15.367 163.297,15.062 163.297,12.852 163.373,12.548 ; 157.912,12.548 157.658,12.268 157.658,10.744 158.293,10.109 158.699,9.703 158.928,9.169 158.928,5.69 159.131,5.918 160.02,6.147 160.884,5.918 161.112,5.69 161.112,6.299 161.112,6.883 161.315,7.417 161.722,7.823 163.779,9.855 163.779,12.217 163.678,12.243 163.373,12.548 ; 164.16,42.139 164.338,42.57 164.668,42.901 ; 5.944,28.372 6.172,29.21 6.096,29.464 7.772,31.14 17.145,31.14 17.272,31.013 17.221,31.013 16.916,30.912 16.612,30.607 16.535,30.302 16.535,30.074 16.434,30.378 16.129,30.683 15.824,30.785 14.63,30.785 14.326,30.683 14.224,30.582 14.122,30.683 13.818,30.785 12.624,30.785 12.319,30.683 12.014,30.378 11.938,30.074 11.938,29.743 11.811,29.439 11.811,27.356 11.989,26.924 12.319,26.594 13.538,25.375 13.538,24.663 13.691,24.003 14.351,23.343 15.24,23.114 16.104,23.343 16.459,23.698 16.459,19.533 16.332,19.583 14.656,19.583 14.656,22.149 14.453,22.631 12.827,24.232 12.802,24.333 12.497,24.638 12.192,24.74 9.982,24.74 9.677,24.638 9.373,24.333 9.296,24.028 9.296,22.276 9.373,21.971 9.677,21.666 9.982,21.59 11.76,21.59 11.786,21.565 9.982,21.565 9.677,21.463 9.373,21.158 9.296,20.853 9.296,19.101 9.373,18.796 9.449,18.72 9.373,18.618 9.322,18.39 9.322,18.618 9.042,19.228 8.966,19.329 8.992,19.355 9.195,19.837 9.195,20.523 9.195,25.349 8.915,25.959 8.433,26.441 6.782,28.092 6.172,28.372 5.944,28.372 ; 32.283,71.12 32.537,70.18 33.223,69.494 34.163,69.24 35.077,69.494 35.763,70.18 36.017,71.12 35.763,72.034 35.077,72.72 34.163,72.974 33.223,72.72 32.537,72.034 32.283,71.12 ; 32.283,79.299 32.537,78.359 33.223,77.673 34.163,77.419 35.077,77.673 35.763,78.359 36.017,79.299 35.763,80.213 35.077,80.899 34.163,81.153 33.223,80.899 32.537,80.213 32.283,79.299 ; 32.283,83.82 32.537,82.88 33.223,82.194 34.163,81.94 35.077,82.194 35.763,82.88 36.017,83.82 35.763,84.734 35.077,85.42 34.163,85.674 33.223,85.42 32.537,84.734 32.283,83.82 ; 65.71,86.741 65.71,86.893 65.811,86.97 65.888,86.893 66.192,86.817 67.386,86.817 67.462,86.817 67.539,86.512 67.843,86.208 68.174,86.131 69.469,86.131 69.799,86.208 70.104,86.512 70.18,86.843 70.18,87.122 70.256,87.122 70.256,86.843 70.333,86.512 70.46,86.411 70.383,86.106 70.536,85.471 70.993,85.014 71.628,84.861 72.238,85.014 72.695,85.471 72.847,86.106 73.025,86.081 73.66,86.081 73.66,83.82 91.973,83.82 92.126,83.185 92.278,83.058 92.278,73.812 92.253,73.889 91.796,74.346 91.567,74.397 91.415,74.473 91.338,74.473 91.288,74.473 91.288,74.752 91.516,74.981 91.669,75.362 91.669,80.315 91.745,80.391 91.897,81.026 91.745,81.636 91.288,82.093 90.678,82.245 90.043,82.093 89.586,81.636 89.433,81.026 89.56,80.543 87.833,80.543 87.528,80.442 87.325,80.264 87.224,80.366 86.36,80.594 85.471,80.366 85.09,79.959 84.684,80.366 83.82,80.594 82.931,80.366 82.55,79.959 82.144,80.366 81.28,80.594 80.391,80.366 80.01,79.959 79.604,80.366 78.74,80.594 77.851,80.366 77.47,79.959 77.064,80.366 76.2,80.594 75.311,80.366 74.93,79.959 74.524,80.366 73.66,80.594 72.771,80.366 72.39,79.959 71.984,80.366 71.12,80.594 70.79,80.493 70.79,81.458 70.714,81.636 70.637,81.788 65.71,86.741 ; 70.79,49.911 72.974,47.727 72.974,47.803 72.898,47.803 72.441,48.26 72.288,48.895 72.441,49.505 72.898,49.962 73.533,50.114 73.609,50.089 73.609,52.045 71.577,54.077 71.501,54.229 71.45,54.407 71.45,57.912 71.12,57.81 70.79,57.912 70.79,49.911 ; 97.587,108.382 97.587,111.658 97.638,111.43 98.222,110.846 99.06,110.617 99.873,110.846 100.457,111.43 100.533,111.76 103.708,111.76 103.708,108.864 103.784,108.56 104.089,108.255 104.394,108.179 106.401,108.179 106.705,108.255 106.909,108.433 106.909,107.29 106.832,107.29 106.528,107.188 106.223,106.883 106.147,106.578 106.147,104.826 106.223,104.521 106.528,104.216 106.832,104.14 109.042,104.14 109.22,104.165 109.372,104.14 111.582,104.14 111.76,104.165 111.912,104.14 114.122,104.14 114.3,104.165 114.452,104.14 116.662,104.14 116.84,104.165 116.992,104.14 119.202,104.14 119.38,104.165 119.532,104.14 121.742,104.14 121.844,104.165 121.945,104.14 124.155,104.14 124.46,104.216 124.765,104.521 124.866,104.826 124.866,106.578 124.765,106.883 124.46,107.188 124.231,107.264 124.231,108.509 124.46,108.737 124.841,108.331 125.73,108.102 126.594,108.331 127.254,108.991 127.432,109.652 127.432,111.303 127.406,111.328 127.457,111.303 127.457,108.788 127.457,108.356 127.61,107.975 127.914,107.671 128.626,106.959 128.93,106.655 129.311,106.502 135.077,106.502 135.458,106.655 136.779,107.975 136.957,108.356 136.957,108.534 137.16,108.737 137.541,108.331 138.43,108.102 139.294,108.331 139.522,108.56 139.522,105.689 139.522,105.105 139.725,104.572 140.132,104.165 141.326,102.997 141.326,98.12 141.046,98.374 140.233,98.603 139.395,98.374 138.963,97.942 138.506,98.374 137.693,98.603 136.855,98.374 136.423,97.942 135.966,98.374 135.153,98.603 134.315,98.374 133.883,97.942 133.426,98.374 132.613,98.603 131.775,98.374 131.343,97.942 130.886,98.374 130.073,98.603 129.235,98.374 128.803,97.942 128.346,98.374 127.533,98.603 127.432,98.577 127.457,98.679 127.305,99.289 126.848,99.746 126.238,99.898 125.603,99.746 125.146,99.289 124.993,98.679 125.019,98.577 124.993,98.603 124.638,98.501 124.638,98.984 124.562,99.162 124.485,99.314 124.003,99.822 124.003,100.965 124.155,100.965 124.46,101.041 124.765,101.346 124.866,101.651 124.866,103.403 124.765,103.708 124.46,104.013 124.155,104.115 121.945,104.115 121.844,104.064 121.742,104.115 119.532,104.115 119.38,104.064 119.202,104.115 116.992,104.115 116.84,104.064 116.662,104.115 114.452,104.115 114.3,104.064 114.122,104.115 111.912,104.115 111.76,104.064 111.582,104.115 109.372,104.115 109.22,104.064 109.042,104.115 106.832,104.115 106.528,104.013 106.223,103.708 106.147,103.403 106.147,101.651 106.223,101.346 106.528,101.041 106.832,100.965 107.01,100.965 107.01,100.533 101.905,105.639 102.413,105.766 102.997,106.35 103.226,107.188 102.997,108.001 102.413,108.585 101.6,108.814 100.762,108.585 100.178,108.001 100.051,107.493 99.339,108.179 98.908,108.382 97.587,108.382 ; 98.755,7.468 99.212,5.715 100.482,4.445 102.235,3.988 103.962,4.445 105.232,5.715 105.689,7.468 105.232,9.195 103.962,10.465 102.235,10.922 100.482,10.465 99.212,9.195 98.755,7.468 ; v1@112.979,19.355 113.208,19.558 113.208,19.609 113.462,19.558 114.452,19.558 114.605,19.583 114.732,19.558 115.722,19.558 115.875,19.583 116.002,19.558 116.992,19.558 117.145,19.583 117.272,19.558 118.262,19.558 118.415,19.583 118.542,19.558 119.329,19.558 119.405,19.406 119.71,19.101 119.736,19.075 120.04,18.771 120.421,18.618 121.539,18.618 121.31,18.364 120.98,18.034 120.701,17.78 119.812,17.78 119.685,17.729 119.532,17.78 118.999,17.78 118.847,18.339 118.389,18.796 117.78,18.948 117.145,18.796 116.688,18.339 116.535,17.78 116.002,17.78 115.875,17.729 115.722,17.78 114.732,17.78 114.605,17.729 114.452,17.78 113.64,17.78 113.64,18.136 113.538,18.44 113.259,18.72 113.132,19.228 v1@112.979,19.355 ; 126.67,65.608 126.949,65.329 126.949,82.017 126.949,82.55 126.949,87.249 127.127,87.732 127.508,88.113 127.991,88.316 128.524,88.316 129.007,88.113 129.134,87.986 129.134,94.691 128.803,95.021 128.346,94.59 127.533,94.361 127.178,94.463 127.178,93.396 127.102,93.218 127.025,93.066 126.67,92.685 126.67,65.608 ; 131.496,40.208 131.496,43.79 132.613,44.933 132.69,45.085 132.766,45.263 132.766,52.248 133.35,52.095 133.96,52.248 134.417,52.705 134.569,53.34 134.417,53.95 134.29,54.077 134.29,61.366 134.62,61.697 134.696,61.62 134.696,40.284 134.645,40.132 134.696,39.954 134.696,39.878 134.747,39.726 134.798,39.497 134.874,39.446 135.204,39.116 135.255,39.04 135.433,39.014 135.28,38.481 135.407,37.998 134.747,37.998 134.62,37.948 134.468,37.998 134.29,37.998 134.163,38.456 133.706,38.913 133.452,38.964 133.553,39.37 133.401,39.98 132.944,40.437 132.334,40.589 131.699,40.437 131.496,40.208 ; 137.338,65.811 137.338,66.065 141.046,69.774 141.275,70.307 141.275,70.891 141.275,76.606 141.275,81.763 142.316,81.763 142.469,81.788 142.469,65.507 142.24,65.278 141.884,65.608 140.97,65.862 140.03,65.608 139.979,65.557 139.827,65.71 139.522,65.811 137.338,65.811 ; 147.65,88.951 147.726,88.646 148.031,88.341 148.336,88.265 151.359,88.265 151.663,88.341 151.968,88.646 152.07,88.951 152.07,91.364 151.968,91.669 151.663,91.973 151.359,92.075 151.054,92.075 151.054,94.564 151.079,94.742 151.054,94.894 151.054,94.971 150.978,95.123 150.927,95.352 150.47,95.809 150.241,95.86 150.089,95.936 150.012,95.936 149.86,95.961 149.682,95.936 149.606,95.936 149.454,95.86 149.225,95.809 149.174,95.733 148.844,95.402 148.768,95.352 148.717,95.123 148.666,94.971 148.666,94.894 148.615,94.742 148.666,94.564 148.666,92.075 148.336,92.075 148.031,91.973 147.726,91.669 147.65,91.364 147.65,88.951
  Top Layer, Top w1.27: 29.515,48.336 29.515,48.057 30.074,47.498 30.074,46.126 31.064,45.136 ; 29.87,51.156 29.362,50.648 29.362,44.755 31.496,44.755 ; J12.20@66.04,59.817 66.167,59.817 66.929,59.055 67.818,59.055 J12.18@68.199,59.436 ; 70.866,58.547 J12.16@70.866,59.563 ; 76.327,80.645 76.327,78.867 80.645,78.867 80.645,81.026 ; J12.10@78.867,59.182 79.375,58.674 79.375,58.166 ; 100.33,37.338 v1(100.33,38.1) v1(100.33,39.37) v1(100.33,40.64) 100.33,41.402 ; 101.6,37.338 v1(101.6,38.1) v1(101.6,39.37) v1(101.6,40.64) v1@101.6,41.656 ; v1@102.87,37.084 v1(102.87,38.1) v1(102.87,39.37) v1(102.87,40.64) v1@102.87,41.656 ; J10.5@109.22,9.017 109.22,11.303 ; 137.16,61.214 138.684,62.738 138.684,65.659 ; 140.97,61.087 140.97,65.405 ; LCD2.16@142.773,96.495 142.773,103.607 140.97,105.41 J9.5@140.97,110.49 140.97,113.157 141.478,113.665 168.148,113.665 168.91,112.903 J9.16@168.91,110.49 ; 159.893,12.7 C37.2@159.893,13.589 ; C38.2@168.58,13.97 168.91,13.97 172.466,17.526 173.355,17.526 172.847,18.034 172.847,22.606 171.704,23.749 U9.2@171.704,25.527 171.704,29.134 ; v1(99.06,36.83) v1(100.33,36.83) v1(101.6,36.83) v1(102.87,36.83) v1(104.14,36.83) v1(104.14,38.1) v1(104.14,39.37) v1(104.14,40.64) v1(104.14,41.91) v1(102.87,41.91) v1(101.6,41.91) v1(100.33,41.91) v1(99.06,41.91) v1(99.06,40.64) v1(99.06,39.37) v1(99.06,38.1) v1(99.06,36.83)
  Top Layer, Top w1.524: R33.3@167.513,58.547 R33.3@167.64,58.42 R33.3@167.64,57.912